# Altium PCB E3_DEEP_A2_ANGERS_CARDOT.PCBDOC
Units mm, origin at the board's own origin, x right, y up, seen from the top; angles counter-clockwise.
Board outline 55.3 x 58.8 mm, 2 copper layers (TopLayer, BottomLayer); 8 components, 12 nets, 76 pads, 13 vias.
Unrouted connection lines stored in the file: 2.
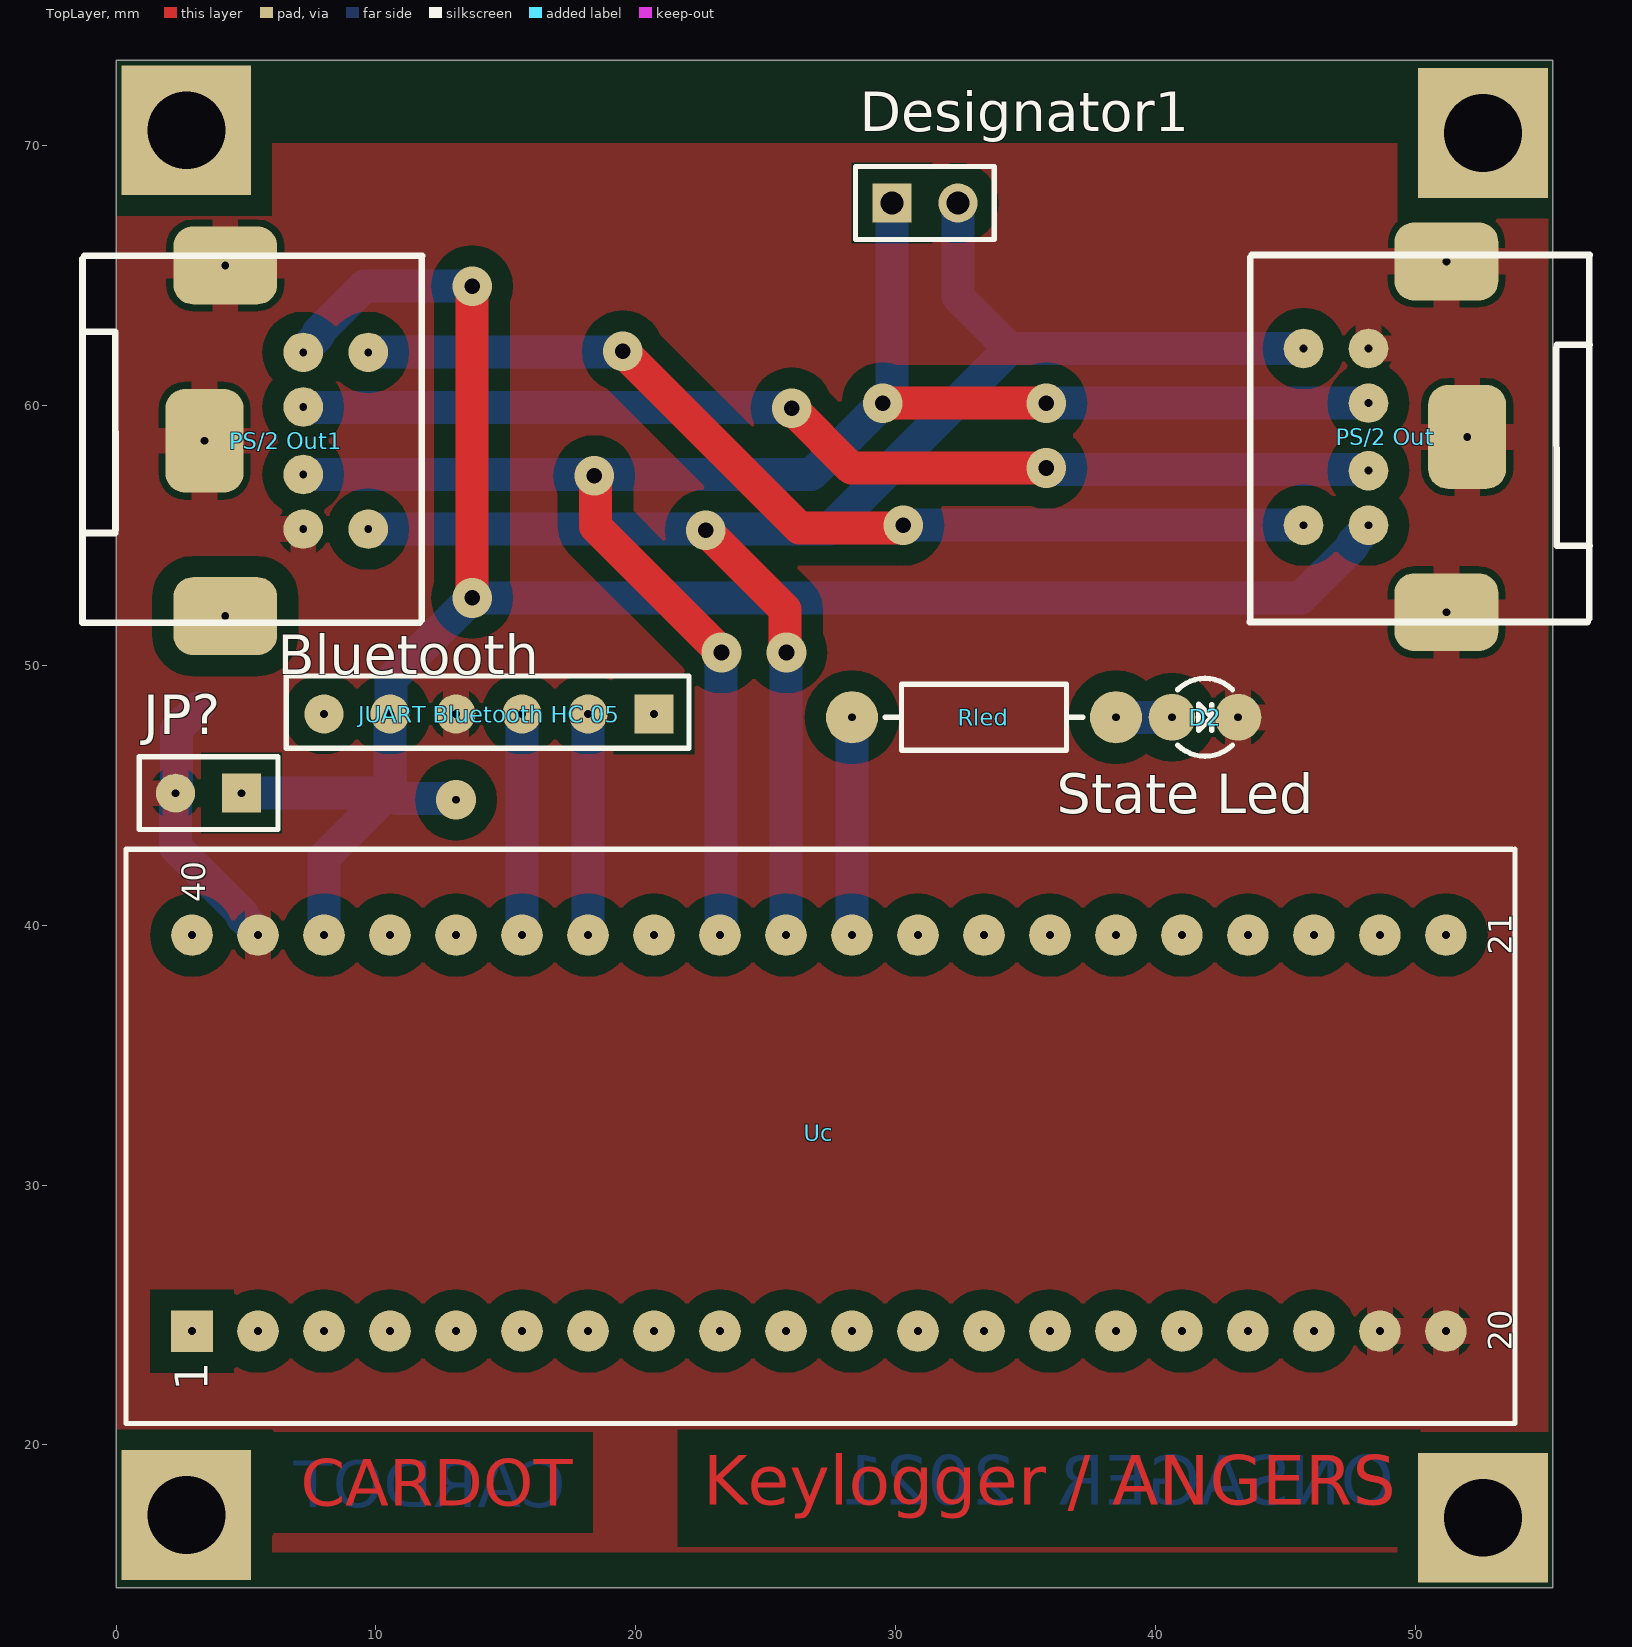
[diagram p0: TopLayer view]
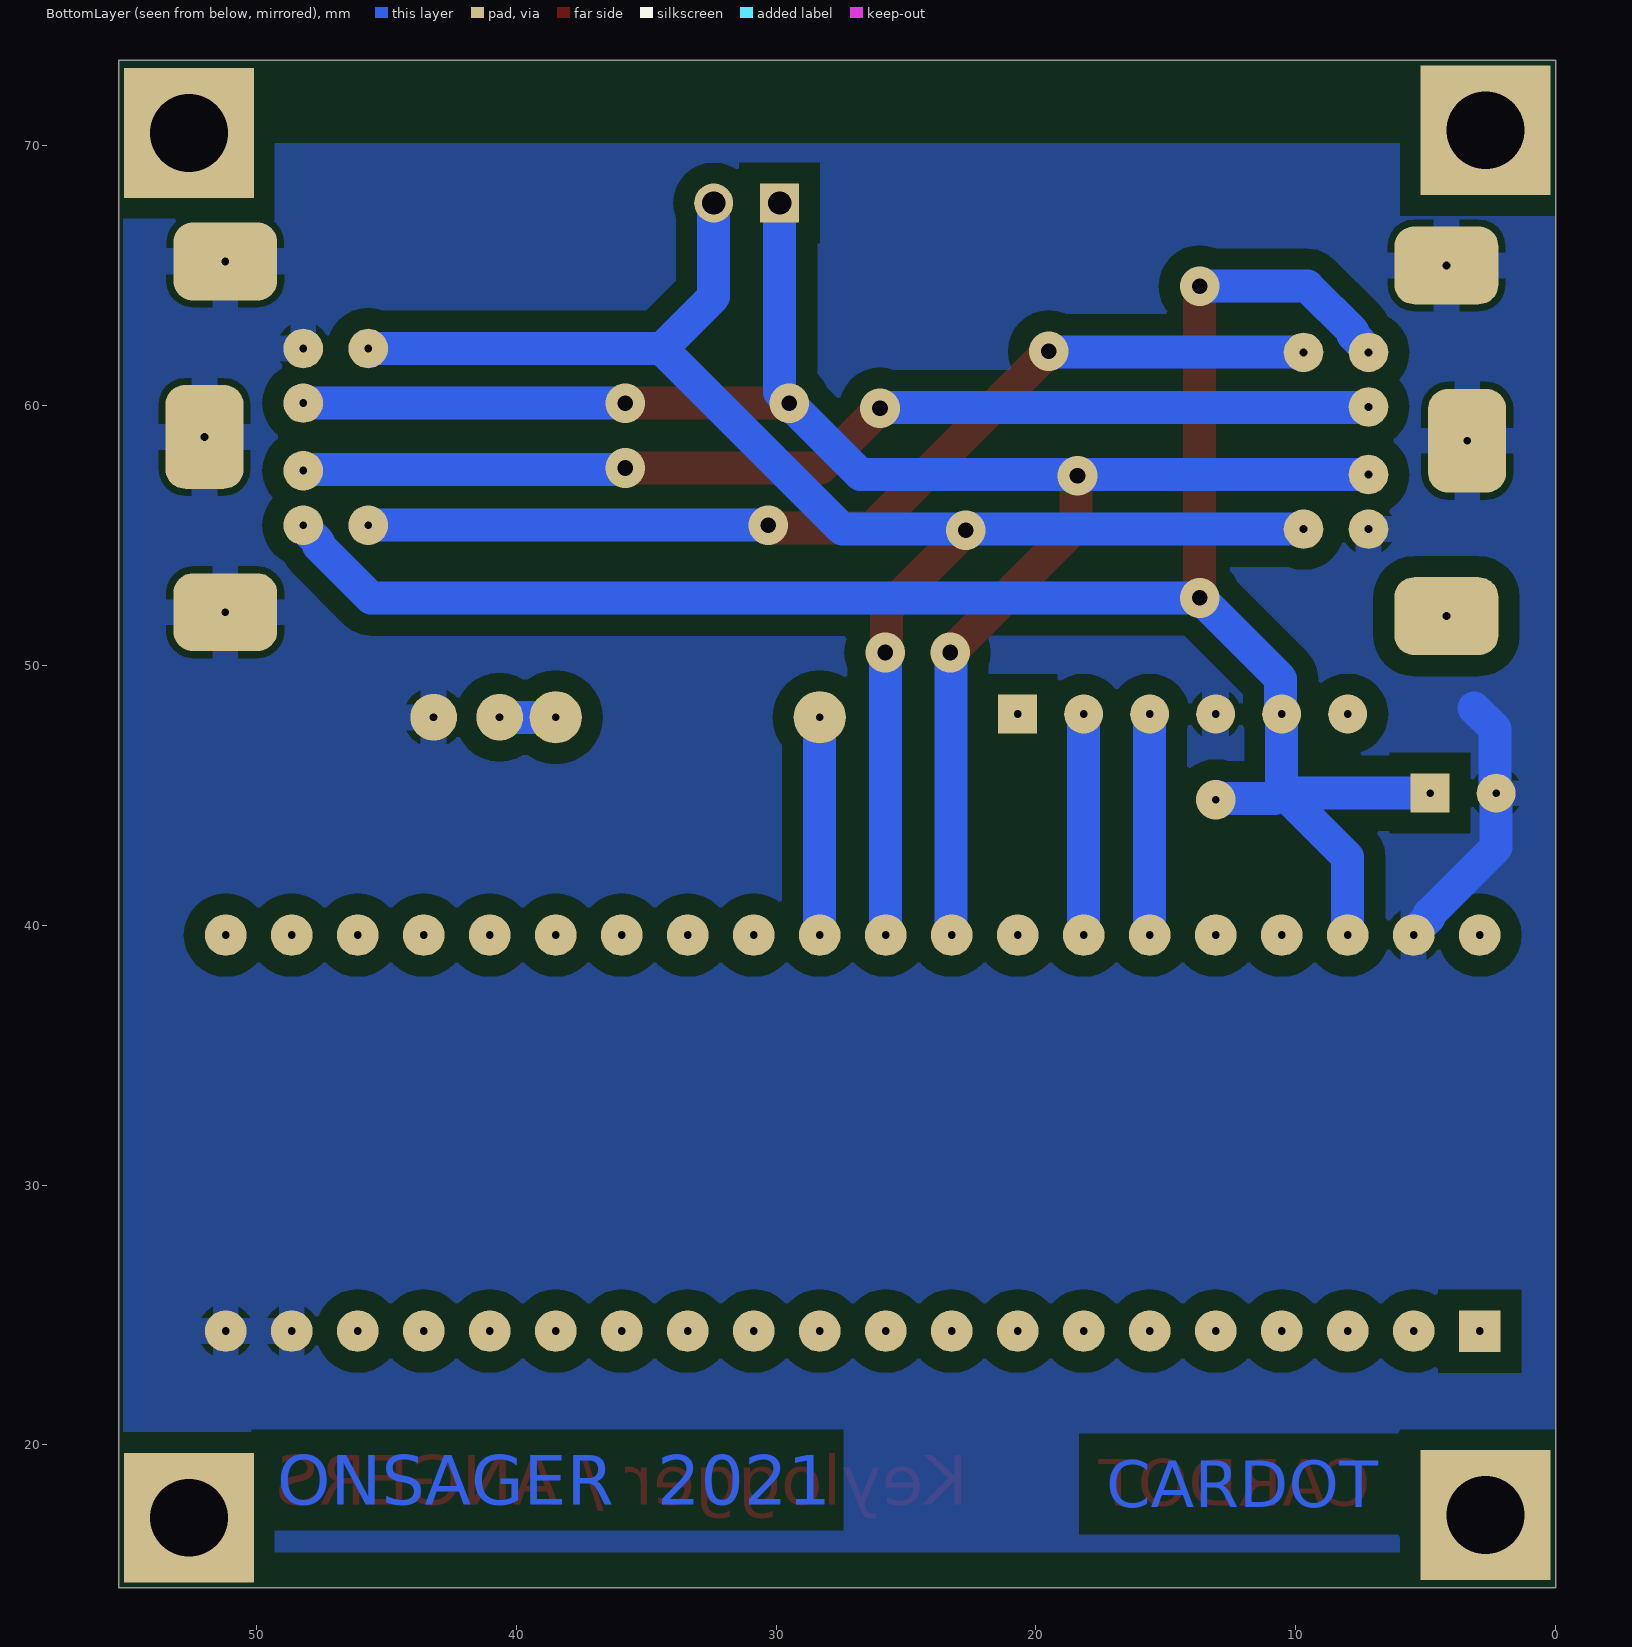
[diagram p1: BottomLayer view, seen from below]

## Layer stack, top to bottom
TopSolder: solder mask 0.0102, Solder Resist, Dk 3.5
TopLayer: signal copper 0.0356
Dielectric1: core 0.32, FR-4, Dk 4.8
BottomLayer: signal copper 0.0356
BottomSolder: solder mask 0.0102, Solder Resist, Dk 3.5

## Board outline
0,14.5 0,73.3 55.3,73.3 55.3,14.5

## Design rules (kind name [scope] priority, off if disabled: settings)
Clearance Clearance_4 [InNamedPolygon('Bot-GND')] p1: gap=0.8 ignorepadtopadclearanceinfootprint=FALSE
Clearance Clearance_3 [InNamedPolygon('Top-GND')] p2: gap=0.8 ignorepadtopadclearanceinfootprint=FALSE
Clearance Clearance_2 [InNamedPolygon('Bot-GND')] p3: gap=0.5 ignorepadtopadclearanceinfootprint=FALSE
Clearance Clearance_1 [InNamedPolygon('Top-GND')] p4: gap=0.5 ignorepadtopadclearanceinfootprint=FALSE
Clearance PowerPlaneClearance [InNamedPolygon('Bot-GND') Or  InNamedPolygon('Top-GND')] p5: gap=1.016 ignorepadtopadclearanceinfootprint=FALSE except(0: Arc-Hole Track-Hole SMDPad-Hole THPad-Hole Via-Hole Fill-Hole Poly-Hole Region-Hole Text-Hole)
Clearance [All] p6: gap=0.508 ignorepadtopadclearanceinfootprint=TRUE except(0: Arc-Hole Track-Hole SMDPad-Hole THPad-Hole Via-Hole Fill-Hole Poly-Hole Region-Hole Text-Hole)
FabricationTestPointUsage TestPointUsage [All] p1: valid=0 allowmultiple=FALSE
FabricationTestpoint Testpoint [All] p1: side=3 testpointundercomponent=TRUE minsize=1.016 maxsize=2.54 preferedsize=1.524 minholesize=0.508 maxholesize=1.016 preferedholesize=0.813 testpointgrid=0.025 allowsidetop=TRUE allowsidebottom=TRUE usegrid=TRUE gridtolerance=0
Height [All] p1: minheight=0 maxheight=50.8 prefheight=12.7
HoleSize [All] p1: absolutevalues=TRUE maxlimit=7.62 minlimit=0.3 maxpercent=80.000 minpercent=20.000
PlaneClearance [All] p1: clearance=1.016
PlaneConnect [All] p1: planeconnectstyle=Relief reliefexpansion=0.5 reliefentries=4 reliefconductorwidth=1.016 reliefairgap=0.5
PolygonConnect [All] p1: connectstyle=Relief reliefconductorwidth=1.016 reliefentries=4 polygonreliefangle="90 Angle" airgapwidth=0.254
RoutingVias [All] p1: holewidth=0.6 width=1.524 viastyle="Through Hole" minholewidth=0.6 minwidth=1.524 maxholewidth=0.6 maxwidth=1.524
SilkToSolderMaskClearance SilkscreenOverComponentPads [IsPad] p1: minsilkscreentomaskgap=0.254 clearancetoexposedcopper=TRUE
SolderMaskExpansion [All] p1: expansion=0.051 istentingtop=FALSE
Width [All] p1: maxlimit=25.4 minlimit=0.508 preferedwidth=1.016
23 further rules are at their usual default settings.

## Components (designator, comment, footprint, x,y, rotation, side; value= is the part's Value field where it differs from the comment)
D2 "LED_3MM" LED_3MM 41.91,48.006 r270 top
Designator1 "Comment" BARRETTE_2_M_D#1 29.86,67.8 r0 top (schematic designator JP?)
JP? "JUMPER2" BARRETTE_2_M_D#2 4.826,45.085 r180 top
"JUART Bluetooth HC 05" "BARRETTE_6 CONTACTS_1 RANGEE_MALE_DROITE" BARRETTE_6_M_D 20.701,48.133 r180 top
"PS/2 Out" "5749231-1" MINIDIN6 1299.785,-1201.45 r270 top
"PS/2 Out1" "5749231-1" MINIDIN6 -1244.385,1318.9 r90 top (schematic designator "PS/2 Input")
Rled "RESISTANCE_AXIALE_1/4W" RESISTANCE_1/4W 28.321,48.006 r0 top value=1K
Uc "STM32F103C8T6/PCB_DIP40" STM32F103C8T6_DIP40 2.921,24.384 r90 top

## Footprints (in the part's own frame and the unit in brackets; to place one, negate y for a bottom-side part, rotate by r counter-clockwise, add the part's x,y. Pads: shape width x height; smd on the part's side, far side on the other; paste and mask are expansions set on the pad)
BARRETTE_2_M_D#1 [mm] "BARRETTE 2 CONTACTS ; 1 RANGEE ; DROITE ; MALE ; ESPACEMENT BROCHES = 2.54 mm"
  rect 1.5x1.5 hole 0.9: 1(0,0)
  round 1.5 hole 0.9: 2(2.54,0)
  silkscreen extent -1.4,-1.4 3.94,1.4, body extent -1.3,-1.2 3.78,1.3, height 8.55
BARRETTE_2_M_D#2 [mm] "BARRETTE 2 CONTACTS ; 1 RANGEE ; DROITE ; MALE ; ESPACEMENT BROCHES = 2.54 mm"
  rect 1.5x1.5 hole 0.3: 1(0,0)
  round 1.5 hole 0.3: 2(2.54,0)
  silkscreen extent -1.4,-1.4 3.94,1.4, body extent -1.3,-1.2 3.78,1.3, height 8.55
BARRETTE_6_M_D [mm] "BARRETTE 6 CONTACTS ; 1 RANGEE ; DROITE ; MALE ; ESPACEMENT BROCHES = 2.54 mm"
  rect 1.5x1.5 hole 0.3: 1(0,0)
  round 1.5 hole 0.3: 2(2.54,0) 3(5.08,0) 4(7.62,0) 5(10.16,0) 6(12.7,0)
  silkscreen extent -1.35,-1.46 14.15,1.32, body extent -1.22,-1.34 14.02,1.2, height 10.1
LED_3MM [mm] "LED 3mm; 2 Leads"
  round 1.8 hole 0.3: 1(0,-1.27) 2(0,1.27)
  silkscreen extent -1.5,-1.06 1.5,1.06, body extent -1.64,-1.65 1.65,1.65, height 5.51
MINIDIN6 [mm] "utilisation fréquente: périphérique PS2"
  rrect50% 3x4 hole 0.3: 0(-1267,-1248.585) 0(-1253.5,-1248.585)
  rrect50% 4x3 hole 0.3: 0(-1260.25,-1247.785)
  round 1.524 hole 0.3: 1(-1258.95,-1251.585) 2(-1261.55,-1251.585) 3(-1256.85,-1251.585) 4(-1263.65,-1251.585) 5(-1256.85,-1254.085) 6(-1263.65,-1254.085)
  silkscreen extent -1267.25,-1256.16 -1253.12,-1243.08, body extent -1267.25,-1255.9 -1253.25,-1243.08, height 13
RESISTANCE_1/4W [mil] "RESISTANCE 0.25W; DIAMETRE : 2.54mm ; LONGUEUR : 6.35mm ; PAS : 10.16mm"
  round 79 hole 11.81: 1(0,0) 2(400,0)
  silkscreen extent 50,-50 350,50, body extent -15,-47 409,44, height 116
STM32F103C8T6_DIP40 [mm] "STM32F103 monté sur DIP40"
  rect 1.6x1.6 hole 0.3: 1(0,0)
  round 1.6 hole 0.3: 2(0,-2.54) 3(0,-5.08) 4(0,-7.62) 5(0,-10.16) 6(0,-12.7) 7(0,-15.24) 8(0,-17.78) 9(0,-20.32) 10(0,-22.86) 11(0,-25.4) 12(0,-27.94) 13(0,-30.48) 14(0,-33.02) 15(0,-35.56) 16(0,-38.1) 17(0,-40.64) 18(0,-43.18) 19(0,-45.72) 20(0,-48.26) 21(15.24,-48.26) 22(15.24,-45.72) 23(15.24,-43.18) 24(15.24,-40.64) 25(15.24,-38.1) 26(15.24,-35.56) 27(15.24,-33.02) 28(15.24,-30.48) 29(15.24,-27.94) 30(15.24,-25.4) 31(15.24,-22.86) 32(15.24,-20.32) 33(15.24,-17.78) 34(15.24,-15.24) 35(15.24,-12.7) 36(15.24,-10.16) 37(15.24,-7.62) 38(15.24,-5.08) 39(15.24,-2.54) 40(15.24,0)
  silkscreen extent -3.56,-50.92 18.54,2.54, body extent -3.63,-51.04 18.37,6.1, height 20.63

## Part data
D2: "LED 3MM - ROUGE/VERTE/JAUNE", Type=LED_3mm
Designator1: library part JUMPER2, "BARRETTE 2 CONTACTS 1 RANGEE MALE DROITE", Type=JUMPER2
JP?: "BARRETTE 2 CONTACTS 1 RANGEE MALE DROITE", Type=JUMPER2
"JUART Bluetooth HC 05": "BARRETTE 6 CONTACTS 1 RANGEE MALE DROITE", Type=M_D_6
"PS/2 Out" "PS/2 Out1": library part MiniDIN6_PS2, FAR=2452346, Ref=5749231-1
Rled: "RESISTANCE TRAVERSANTE AXIALE 1/4W", Type=1/4W
Uc: "MICROCONTROLEUR 32 BITS - 72MHz - 34 I/O - 64 KO : FLASH - 20KO RAM - 10 CANAUX A/D 12 BITS - DIP40 - UART, SPI, I2C, USB, CAN", Package=DIP40, Type=STM32F103C8T6

## Free pads (board coordinates)
  rect 5x5 hole 3: 6(52.6,70.5) 7(52.6,17.2) 8(2.7,17.3) ""(2.7,70.6)

## Via types
v1: diameter 1.524, hole 0.6, TopLayer to BottomLayer, 12 vias
v2: diameter 1.524, hole 0.3, TopLayer to BottomLayer, 1 vias

## Nets (pads, with @x,y where several pads share a name; then routed paths per layer and width w, separated by ;. In a path a pad name is that pad's centre, name@x,y a point inside that pad or via, vN(x,y) a via of type N, cw(c..) or ccw(c..) an arc to the next point about the centre after c; other vN are vias at no path point)
+3V3_BP: Uc.40
+5V: "JUART Bluetooth HC 05.5" "PS/2 Out1.3" "PS/2 Out.3" JP?.1 Uc.38 | length 79.1
  TopLayer w1.27: v1(13.7,52.6) v1(13.7,64.6)
  BottomLayer w1.27: JP?.1 10.464,45.085 ; 7.2,62.05 7.2,62.119 7.795,62.714 7.795,62.839 9.556,64.6 v1(13.7,64.6) ; Uc.38 8.001,42.622 10.464,45.085 ; v2(13.081,44.831) 13.032,44.88 10.823,44.88 10.541,45.162 ; 48.2,55.4 48.2,55.331 47.605,54.736 47.605,54.611 45.594,52.6 v1(13.7,52.6) 10.585,49.485 10.585,48.177 10.541,48.133 10.541,45.162 ; 10.464,45.085 10.541,45.162
GND: "JUART Bluetooth HC 05.4" "PS/2 Out1.0"@3.4,58.65 "PS/2 Out1.0"@4.2,65.4 "PS/2 Out1.4" "PS/2 Out.0" "PS/2 Out.4" D2.2 JP?.2 Uc.19 Uc.20 Uc.39 | length 10.4
  BottomLayer w1.27: 3.136,48.363 2.33,47.557 2.33,45.129 JP?.2 2.286,43.007 4.864,40.429 4.864,40.31 5.461,39.713 Uc.39
NetD2_1: D2.1 Rled.2 | length 2.2
  BottomLayer w1.27: Rled.2 D2.1
"NetPS/2 Input_2": "PS/2 Out1.1" "PS/2 Out.1" | length 42
  TopLayer w1.27: v1(26,59.9) 28.3,57.6 v1(35.8,57.6)
  BottomLayer w0.635: 7.2,59.95 7.225,59.925 ; v1@25.975,59.925 v1(26,59.9) ; v1(35.8,57.6) v1@35.85,57.55 ; 48.15,57.55 48.2,57.5
  BottomLayer w1.27: 7.225,59.925 v1@25.975,59.925 ; v1@35.85,57.55 48.15,57.55
"NetPS/2 Input_6": "PS/2 Out1.5" "PS/2 Out.5" | length 38.9
  TopLayer w1.27: v1(19.5,62.1) 26.3,55.3 30,55.3 30.054,55.354 30.248,55.354 v1(30.297,55.403)
  BottomLayer w1.27: 9.7,62.05 9.725,62.075 19.475,62.075 v1(19.5,62.1) ; v1(30.297,55.403) 30.3,55.4 45.7,55.4
PA15_LED: Rled.1 Uc.30 | length 8.4
  BottomLayer w1.27: Uc.30 Rled.1
PB3: "PS/2 Out1.6" "PS/2 Out.6" Designator1.2 Uc.31 | length 62.2
  TopLayer w1.27: v1(22.7,55.2) 25.751,52.149 25.751,50.549 v1(25.8,50.5)
  BottomLayer w1.27: 9.7,55.25 27.45,55.25 34.4,62.2 ; Uc.31 25.79,39.633 25.79,50.491 v1(25.8,50.5) ; Designator1.2 32.4,64.2 34.4,62.2 ; 45.7,62.2 34.4,62.2
PB4: "PS/2 Out1.2" "PS/2 Out.2" Designator1.1 Uc.32 | length 69.7
  TopLayer w1.27: v1(18.4,57.3) 18.449,57.251 18.449,55.351 v1(23.3,50.5) ; v1(29.5,60.1) v1(35.8,60.1)
  BottomLayer w1.27: 7.2,57.35 26.75,57.35 v1(29.5,60.1) 29.5,60.169 29.86,60.529 Designator1.1 ; Uc.32 23.27,39.653 23.27,50.471 v1(23.3,50.5) ; v1(35.8,60.1) 48.2,60.1
PB5: Uc.33
PB6_U1TX: "JUART Bluetooth HC 05.2" Uc.34 | length 8.5
  BottomLayer w1.27: Uc.34 18.161,48.133
PB7_U1RX: "JUART Bluetooth HC 05.3" Uc.35 | length 8.5
  BottomLayer w1.27: Uc.35 15.621,48.133
pads on no net: "JUART Bluetooth HC 05.1" "JUART Bluetooth HC 05.6" "PS/2 Out1.0"@4.2,51.9 Uc.1 Uc.2 Uc.3 Uc.4 Uc.5 Uc.6 Uc.7 Uc.8 Uc.9 Uc.10 Uc.11 Uc.12 Uc.13 Uc.14 Uc.15 Uc.16 Uc.17 Uc.18 Uc.21 Uc.22 Uc.23 Uc.24 Uc.25 Uc.26 Uc.27 Uc.28 Uc.29 Uc.36 Uc.37

## Polygon pours and split planes (outlines as drawn)
GND on BottomLayer "Bot-GND" (solid, remove dead copper, pour order 5): 0,70.104 55.118,70.104 55.118,15.875 0,15.875
GND on TopLayer "Top-GND" (solid, pour order 4): 0,70.104 55.118,70.104 55.118,15.875 0,15.875

## Other copper
TopLayer:
  text "Keylogger / ANGERS" at 22.6,17.7 h1.91
  text "CARDOT" at 7.112,17.653 h1.8
BottomLayer:
  text "ONSAGER  2021" at 49.2,17.7 h1.91
  text "CARDOT" at 17.3,17.6 h1.8

## Silkscreen, mask and mechanical layers (free items; w line width, h text height)
TopOverlay:
  text "Bluetooth" at 6.223,49.657 h1.52
  text "State Led" at 36.195,44.323 h1.52
  text "Consignes / Conseils :" at 147.701,35.687 h10
  text "1- désactivez la fonctionnalité \"online DRC\"" at 160.02,26.416 h10
  text "Tools->Preferences -> décocher 'online DRC'" at 172.085,16.637 h10
  text "Tools->Reset error markers" at 172.466,5.842 h10
  text "2- Déplacez les plans de masse en dehors de la carte" at 159.893,-4.953 h10
  text "3- Si elles sont visibles / gênantes : masquez les couches mécaniques 3D" at 159.258,-18.288 h10
  text "Bouton-droit sur les onglets (en bas) Mechanical1, 13 -> Hide" at 173.228,-29.591 h10
  text "4- mettre vos noms à la place de \"nom du binôme\"" at 159.131,-43.434 h10
  text "5- Par défaut, la taille de piste minimale est définie à 20 mils.  /     Si cela s'avère absolutement nécessaire (passage entre deux broches espacées de 2,54mm...), vous pouvez modifier ce réglage dans /     -> Design -> Rules -> Routing -> Width -> Width" at 158.623,-85.344 h10
  text "6- Par défaut, la clearance (espace minimale entre deux objets dont le net diffère) est reglée à 20 mils. /     Si cela s'avère nécessaire (petit composant CMS / volonté assumée d'une règle moins stricte), /      vous pouvez descendre à 10mils : /     -> Design -> Rules -> Electrical -> Clearance-> Clearance" at 158.877,-125.349 h10
Mechanical1:
  the board outline again, w0.508

## Text inside footprints (layer, text, board x,y; h text height)
Uc: TopOverlay "21" at 53.721,38.862 h0.9 r90; TopOverlay "40" at 3.429,40.894 h0.9 r90; TopOverlay "20" at 53.721,23.622 h0.9 r90; TopOverlay "1" at 3.521,22.084 h1.27 r90